# Altium PCB zx-SD-Card_SPI.PcbDoc
Units mm, origin at the board's own origin, x right, y up, seen from the top; angles counter-clockwise.
Board outline 94.78 x 52 mm, 2 copper layers (Top Layer, Bottom Layer); 27 components, 62 nets, 250 pads, 75 vias.
Unrouted connection lines stored in the file: 1.
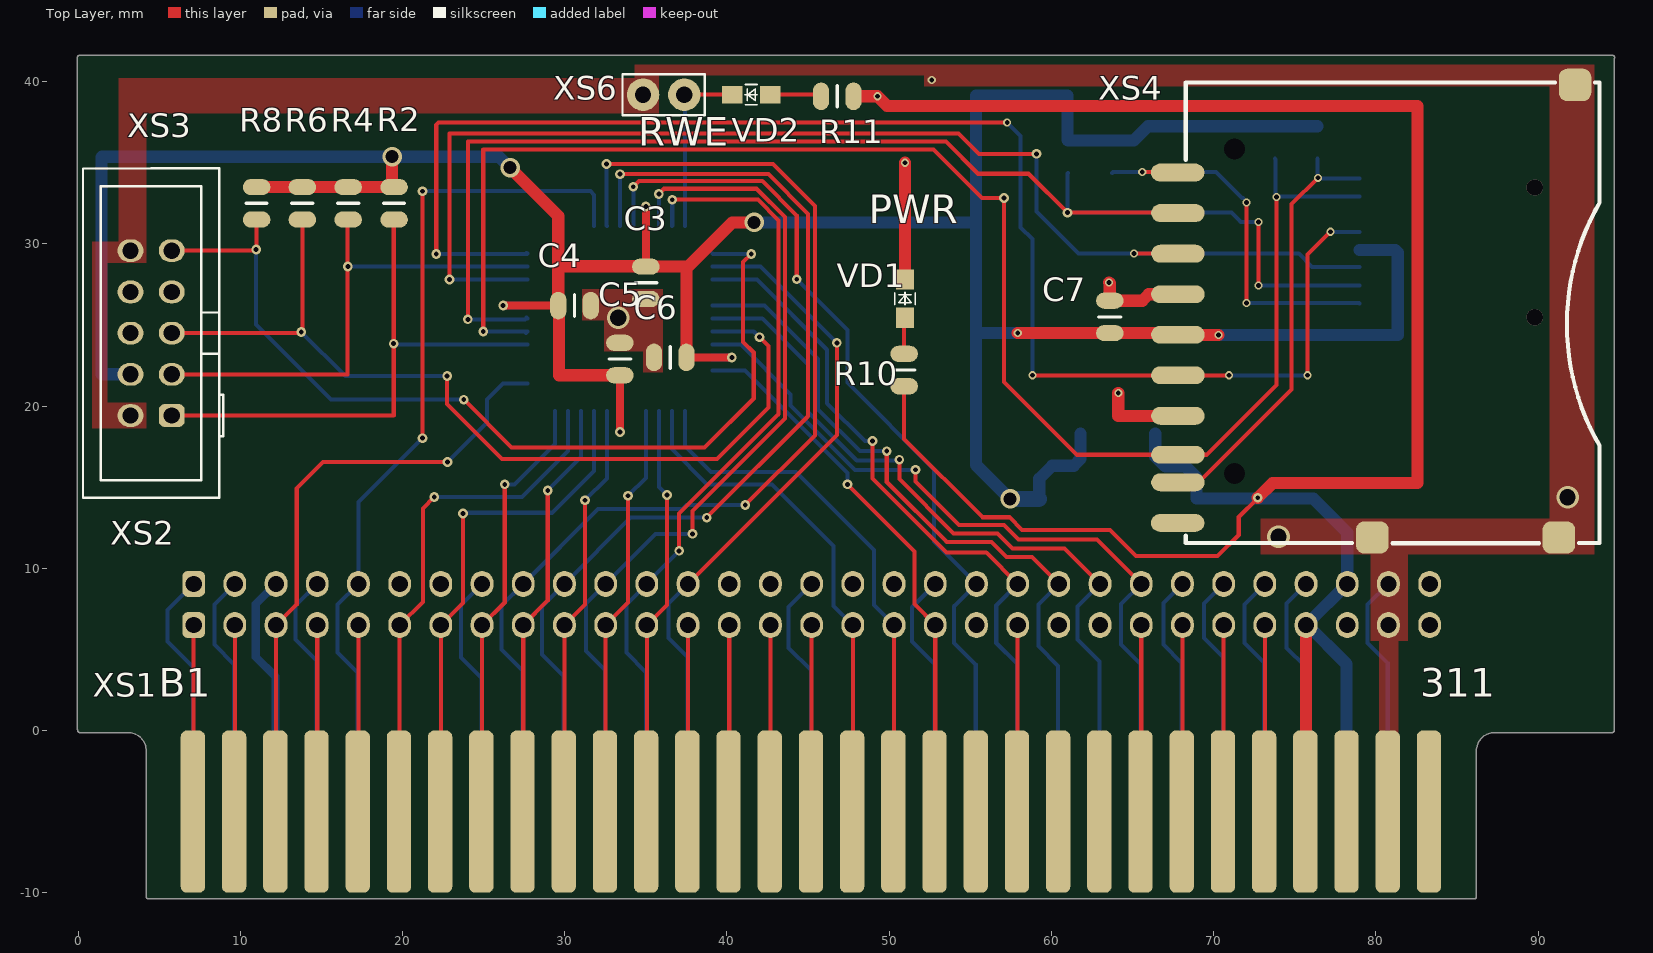
[diagram p0: Top Layer view]
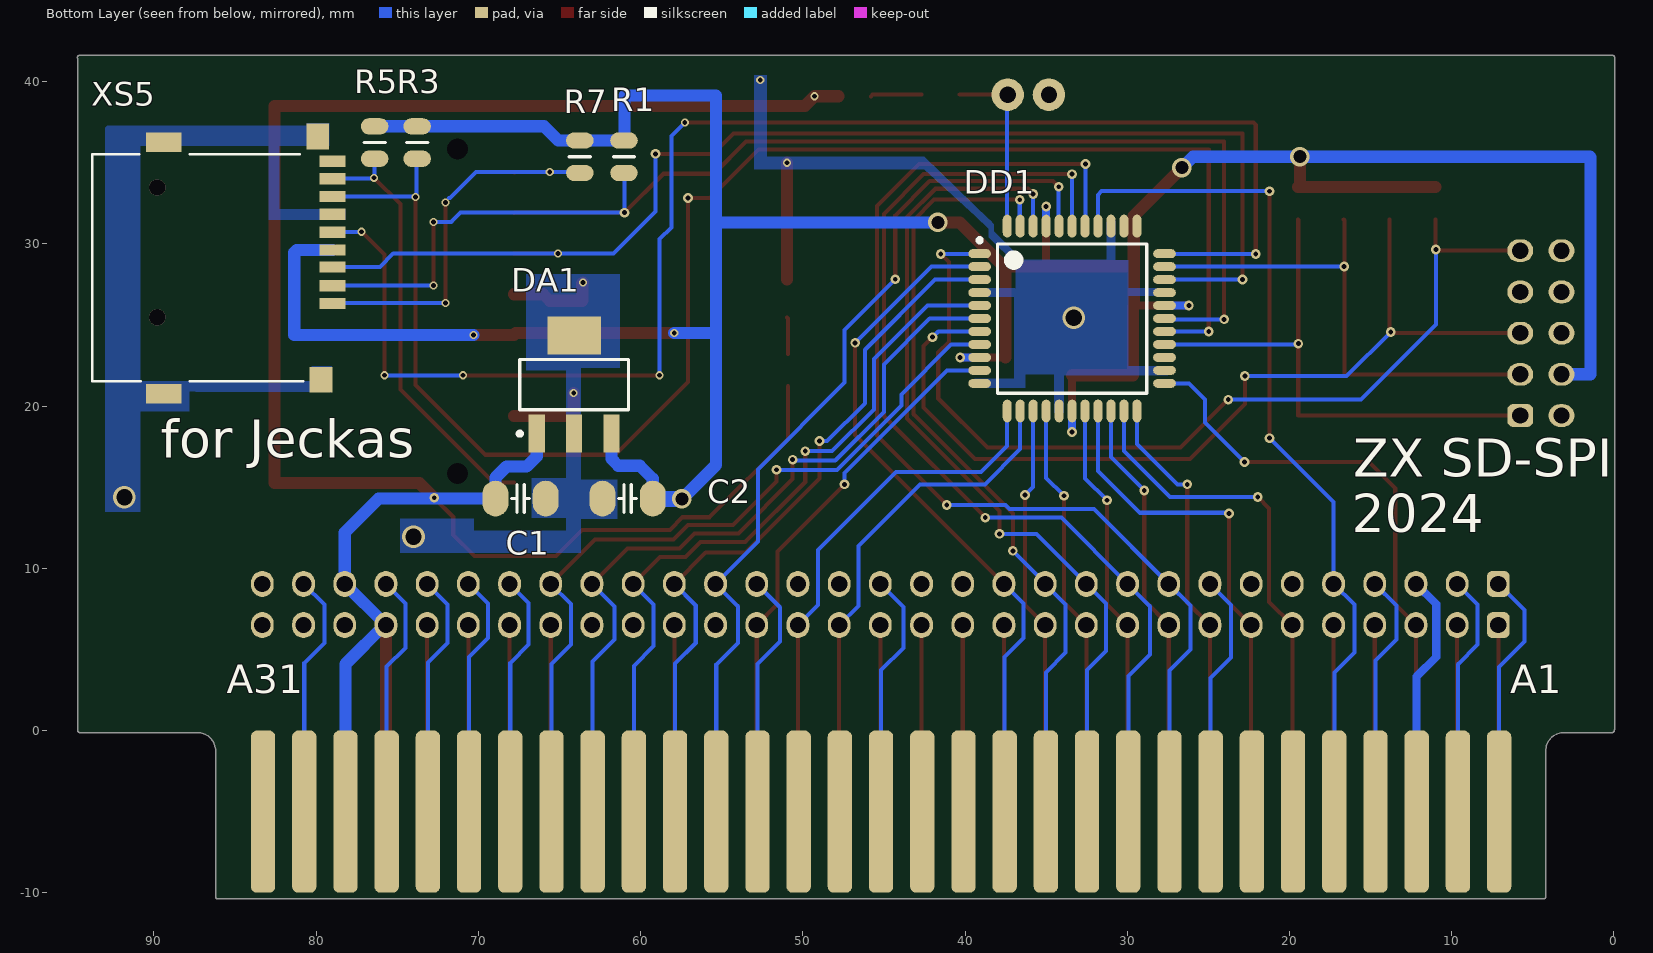
[diagram p1: Bottom Layer view, seen from below]
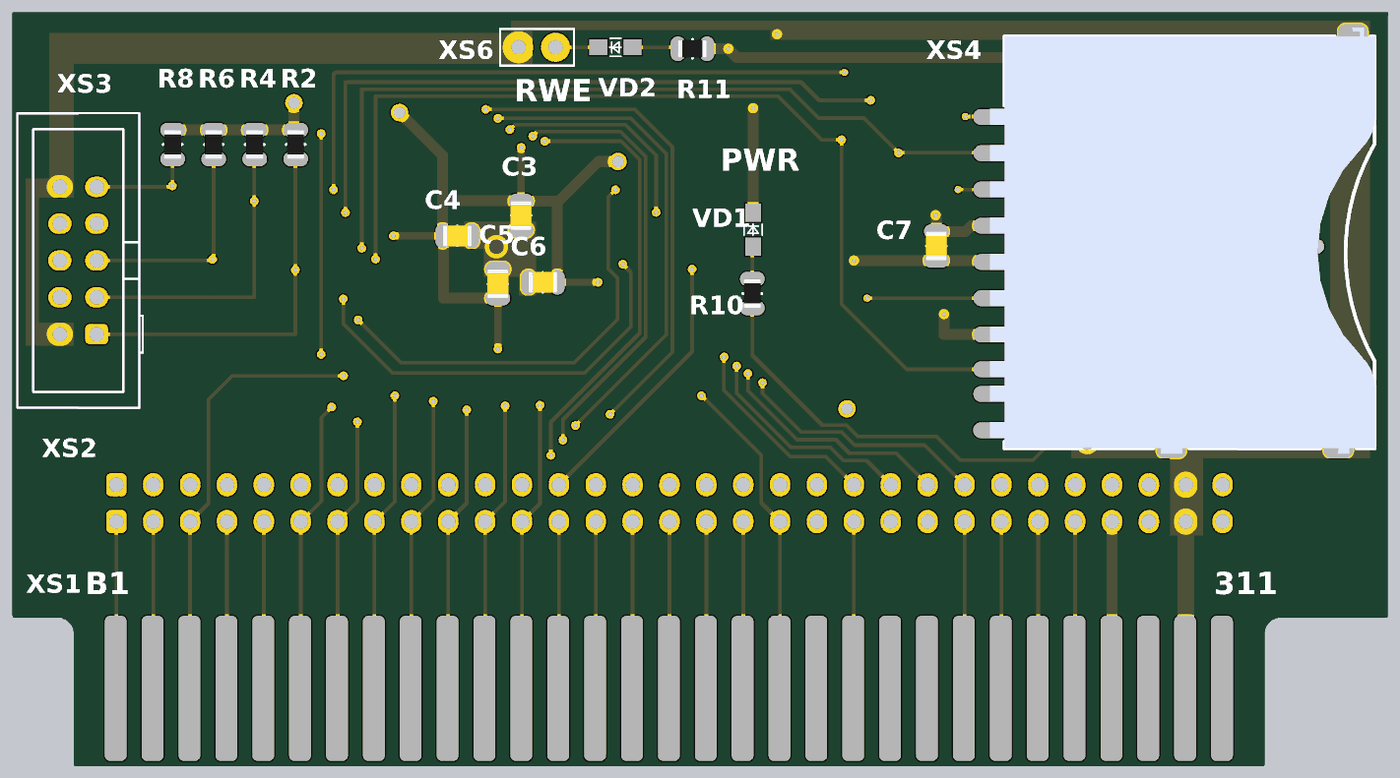
[diagram p2: 3D render of the assembled board from above, using the file's embedded part models]
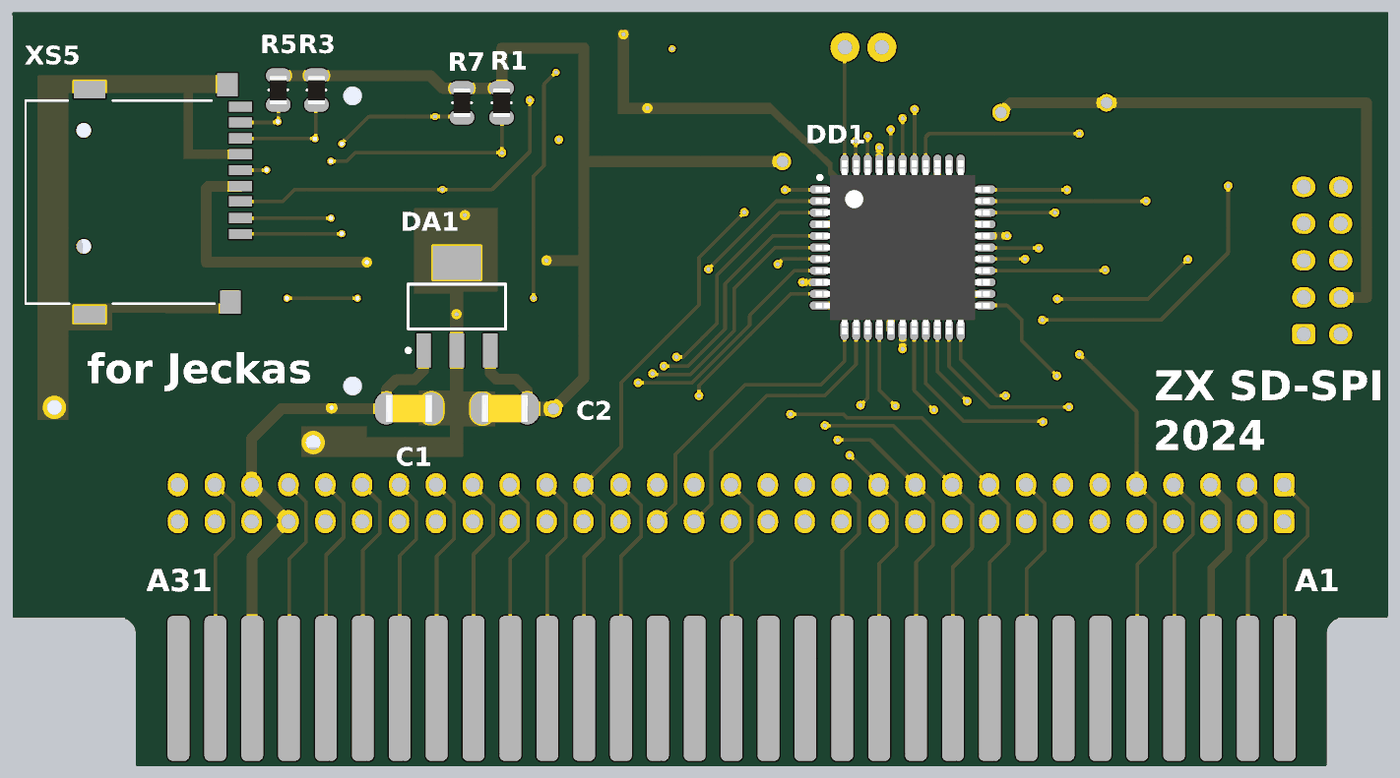
[diagram p3: 3D render of the assembled board from below, using the file's embedded part models]

## Layer stack, top to bottom
Top Solder: solder mask 0.0102, Solder Resist, Dk 3.5
Top Layer: signal copper 0.0356
Dielectric 1: dielectric 0.32, FR-4, Dk 4.8
Bottom Layer: signal copper 0.0356
Bottom Solder: solder mask 0.0102, Solder Resist, Dk 3.5

## Board outline
4.198,-10.25 4.198,-1.25 cw(c4.325,-1.25) 4.198,-1.249 cw(c3.075,-1.25) 4.198,-1.25 ccw(c4.325,-1.25) 4.198,-1.25 4.198,-1.249 ccw(c3.075,-1.25) 3.075,-0.127 0.1,-0.127 cw(c0.1,0) -0.026,0.022 cw(c0.075,0.1) -0.052,0.1 -0.052,41.5 cw(c0.075,41.5) 0.075,41.627 94.6,41.627 cw(c94.6,41.5) 94.727,41.5 cw(c94.6,41.5) 94.702,41.424 94.702,0 cw(c94.575,0) 94.537,-0.122 cw(c94.5,0) 94.5,-0.127 87.325,-0.127 ccw(c87.325,-1.25) 86.202,-1.249 cw(c86.075,-1.25) 86.202,-1.25 86.202,-10.25 cw(c86.075,-10.25) 86.075,-10.377 4.325,-10.377 cw(c4.325,-10.25)

## Design rules (kind name [scope] priority, off if disabled: settings)
Clearance [All] p1: gap=0.15 ignorepadtopadclearanceinfootprint=FALSE
PolygonConnect [All] p1: connectstyle=Direct reliefconductorwidth=0.254 reliefentries=4 polygonreliefangle="90 Angle" airgapwidth=0.254
RoutingVias [All] p1: holewidth=0.3 width=0.6 viastyle="Through Hole" minholewidth=0.2 minwidth=0.4 maxholewidth=2 maxwidth=3
SolderMaskExpansion [All] p1: expansion=0.102
Width [All] p1: maxlimit=2 minlimit=0.2 preferedwidth=0.75
30 further rules are at their usual default settings.

## Components (designator, comment, footprint, x,y, rotation, side; value= is the part's Value field where it differs from the comment)
C1 "1 мкФ" "CAP C 3216 (1206) 1.9h" 67.4,14.3 r0 bottom
C2 "1 мкФ" "CAP C 3216 (1206) 1.9h" 60.8,14.3 r180 bottom
C3 "1 мкФ" "CAP C 2012 (0805) 1.45h" 35,27.6 r270 top
C4 "1 мкФ" "CAP C 2012 (0805) 1.45h" 30.6,26.2 r0 top
C5 "1 мкФ" "CAP C 2012 (0805) 1.45h" 33.4,22.9 r90 top
C6 "1 мкФ" "CAP C 2012 (0805) 1.45h" 36.5,23 r180 top
C7 "1 мкФ" "CAP C 2012 (0805) 1.45h" 63.6,25.5 r90 top
DA1 "MIC39100-3.3WS" MIC39100-3.3WS 64.1,21.325 r90 bottom
DD1 "EPM3032" "ALTERA TQFP-44" 33.4,25.4 r180 bottom
R1 "10 кОм" "RES C 2012 (0805) 0.65h" 61.025,35.375 r90 bottom
R2 "10 кОм" "RES C 2012 (0805) 0.65h" 19.475,32.5 r270 top
R3 "10 кОм" "RES C 2012 (0805) 0.65h" 73.775,36.25 r90 bottom
R4 "10 кОм" "RES C 2012 (0805) 0.65h" 16.65,32.5 r270 top
R5 "10 кОм" "RES C 2012 (0805) 0.65h" 76.4,36.25 r90 bottom
R6 "10 кОм" "RES C 2012 (0805) 0.65h" 13.825,32.5 r270 top
R7 "10 кОм" "RES C 2012 (0805) 0.65h" 63.75,35.375 r90 bottom
R8 "10 кОм" "RES C 2012 (0805) 0.65h" 11,32.5 r270 top
R10 "510 Ом" "RES C 2012 (0805) 0.65h" 50.925,22.225 r90 top
R11 "510 Ом" "RES C 2012 (0805) 0.65h" 46.8,39.1 r180 top
VD1 "KPT-2012" KPT-2012 50.975,26.625 r90 top
VD2 "KPT-2012" KPT-2012 41.5,39.2 r180 top
XS1 "KLS1-603C-62S" "KLS1-603 ISA" 45.175,-5 r0 top
XS2 "KLS1-603C-62S" KLS1-603C-64S 45.22,7.77 r0 top
XS3 "BH-10" BH-10 4.5,24.5 r90 top
XS4 "104D-TCA0-R03" 104D-TCA0-R03 67.786,34.4 r0 top
XS5 "uSD header" uSD 84.3,28.7 r270 bottom
XS6 "PLS-2" PLS-2 36.1,39.2 r180 top

## Footprints (in the part's own frame and the unit in brackets; to place one, negate y for a bottom-side part, rotate by r counter-clockwise, add the part's x,y. Pads: shape width x height; smd on the part's side, far side on the other; paste and mask are expansions set on the pad)
104D-TCA0-R03 [mm]
  oval 3.3x1.1 smd mask+0.1: 1(0.014,-2.5) 2(0.014,-5) 3(0.014,-7.5) 4(0.014,-10) 5(0.014,-12.5) 6(0.014,-15) 7(0.014,-17.4) 8(0.014,-19.1) 9(0,0) 10(0,-21.6)
  rrect50% 2x2 smd: 11(12,-22.5) 13(24.5,5.4)
  rrect50% 2x2 smd mask+0.1: 12(23.5,-22.5)
  round 0 hole 1.3 unplated: 14(3.5,1.45) 15(3.5,-18.55)
  silkscreen extent 0.5,-22.85 26.01,5.55, body extent -0.48,-23.24 26.02,6.16, height 2.75
"ALTERA TQFP-44" [mm]
  oval 1.4x0.55 smd: 1(-5.7,4) 2(-5.7,3.2) 3(-5.7,2.4) 4(-5.7,1.6) 5(-5.7,0.8) 6(-5.7,0) 7(-5.7,-0.8) 8(-5.7,-1.6) 9(-5.7,-2.4) 10(-5.7,-3.2) 11(-5.7,-4) 23(5.7,-4) 24(5.7,-3.2) 25(5.7,-2.4) 26(5.7,-1.6) 27(5.7,-0.8) 28(5.7,0) 29(5.7,0.8) 30(5.7,1.6) 31(5.7,2.4) 32(5.7,3.2) 33(5.7,4)
  oval 0.55x1.4 smd: 12(-4,-5.7) 13(-3.2,-5.7) 14(-2.4,-5.7) 15(-1.6,-5.7) 16(-0.8,-5.7) 17(0,-5.7) 18(0.8,-5.7) 19(1.6,-5.7) 20(2.4,-5.7) 21(3.2,-5.7) 22(4,-5.7) 34(4,5.7) 35(3.2,5.7) 36(2.4,5.7) 37(1.6,5.7) 38(0.8,5.7) 39(0,5.7) 40(-0.8,5.7) 41(-1.6,5.7) 42(-2.4,5.7) 43(-3.2,5.7) 44(-4,5.7)
  silkscreen extent -5.82,-4.6 4.6,4.95, body extent -6,-6 6,6, height 0.2
BH-10 [mm] "IDC разъем 2,54 мм, на плату"
  rrect50% 1.4x1.6 hole 1: 1(-5.08,-1.27)
  oval 1.4x1.6 hole 1: 2(-5.08,1.27) 3(-2.54,-1.27) 4(-2.54,1.27) 5(0,-1.27) 6(0,1.27) 7(2.54,-1.27) 8(2.54,1.27) 9(5.08,-1.27) 10(5.08,1.27)
  silkscreen extent -10.16,-4.45 10.16,4.2
"CAP C 2012 (0805) 1.45h" [mm] "Chip Capacitor, non-polarized, 2.0x1.3mm"
  oval 1x1.7 smd: 1(-1,0) 2(1,0)
  silkscreen extent 0,-0.67 0,0.67, body extent -1,-0.73 1,0.72, height 1.19
"CAP C 3216 (1206) 1.9h" [mm] "Chip Capacitor, non-polarized, 3.2x1.6mm"
  oval 1.6x2.2 smd: 1(-1.55,0) 2(1.55,0)
  silkscreen extent -0.55,-0.85 0.55,0.85, body extent -1.6,-0.95 1.6,0.95, height 1.59
"KLS1-603 ISA" [mm]
  rrect50% 1.5x10 smd far side: A1(-38.1,0) A2(-35.56,0) A3(-33.02,0) A4(-30.48,0) A5(-27.94,0) A6(-25.4,0) A7(-22.86,0) A8(-20.32,0) A9(-17.78,0) A10(-15.24,0) A11(-12.7,0) A12(-10.16,0) A13(-7.62,0) A14(-5.08,0) A15(-2.54,0) A16(0,0) A17(2.54,0) A18(5.08,0) A19(7.62,0) A20(10.16,0) A21(12.7,0) A22(15.24,0) A23(17.78,0) A24(20.32,0) A25(22.86,0) A26(25.4,0) A27(27.94,0) A28(30.48,0) A29(33.02,0) A30(35.56,0) A31(38.1,0)
  rrect50% 1.5x10 smd: B1(-38.1,0) B2(-35.56,0) B3(-33.02,0) B4(-30.48,0) B5(-27.94,0) B6(-25.4,0) B7(-22.86,0) B8(-20.32,0) B9(-17.78,0) B10(-15.24,0) B11(-12.7,0) B12(-10.16,0) B13(-7.62,0) B14(-5.08,0) B15(-2.54,0) B16(0,0) B17(2.54,0) B18(5.08,0) B19(7.62,0) B20(10.16,0) B21(12.7,0) B22(15.24,0) B23(17.78,0) B24(20.32,0) B25(22.86,0) B26(25.4,0) B27(27.94,0) B28(30.48,0) B29(33.02,0) B30(35.56,0) B31(38.1,0)
KLS1-603C-64S [mm]
  rrect50% 1.4x1.6 hole 1: A1(-38.1,1.27) B1(-38.1,-1.27)
  oval 1.4x1.6 hole 1: A2(-35.56,1.27) A3(-33.02,1.27) A4(-30.48,1.27) A5(-27.94,1.27) A6(-25.4,1.27) A7(-22.86,1.27) A8(-20.32,1.27) A9(-17.78,1.27) A10(-15.24,1.27) A11(-12.7,1.27) A12(-10.16,1.27) A13(-7.62,1.27) A14(-5.08,1.27) A15(-2.54,1.27) A16(0,1.27) A17(2.54,1.27) A18(5.08,1.27) A19(7.62,1.27) A20(10.16,1.27) A21(12.7,1.27) A22(15.24,1.27) A23(17.78,1.27) A24(20.32,1.27) A25(22.86,1.27) A26(25.4,1.27) A27(27.94,1.27) A28(30.48,1.27) A29(33.02,1.27) A30(35.56,1.27) A31(38.1,1.27) B2(-35.56,-1.27) B3(-33.02,-1.27) B4(-30.48,-1.27) B5(-27.94,-1.27) B6(-25.4,-1.27) B7(-22.86,-1.27) B8(-20.32,-1.27) B9(-17.78,-1.27) B10(-15.24,-1.27) B11(-12.7,-1.27) B12(-10.16,-1.27) B13(-7.62,-1.27) B14(-5.08,-1.27) B15(-2.54,-1.27) B16(0,-1.27) B17(2.54,-1.27) B18(5.08,-1.27) B19(7.62,-1.27) B20(10.16,-1.27) B21(12.7,-1.27) B22(15.24,-1.27) B23(17.78,-1.27) B24(20.32,-1.27) B25(22.86,-1.27) B26(25.4,-1.27) B27(27.94,-1.27) B28(30.48,-1.27) B29(33.02,-1.27) B30(35.56,-1.27) B31(38.1,-1.27)
KPT-2012 [mm] "SMD LED"
  rect 1.25x1.1 smd: 1(-1.175,0) 2(1.175,0)
  silkscreen extent -0.38,-0.63 0.4,0.63
MIC39100-3.3WS [mm] "SOT223, 4-Leads, Body 6,50x7,00mm (avg), Pitch 2,30mm, IPC Low Density"
  rect 2.35x1 smd: 1(-3.025,2.3) 2(-3.025,0) 3(-3.025,-2.3)
  rect 2.35x3.3 smd: 4(3.025,0)
  silkscreen extent -3.15,-3.35 1.55,3.48, body extent -1.85,-3.35 1.85,3.35, height 1.8
PLS-2 [mm]
  round 2 hole 1: 1(-1.27,0) 2(1.27,0)
  silkscreen extent -2.54,-1.27 2.54,1.27
"RES C 2012 (0805) 0.65h" [mm] "Chip Resistor, Body 2.0x1.3mm, 0.125 Watt"
  oval 1x1.7 smd: 1(-1,0) 2(1,0)
  silkscreen extent 0,-0.65 0,0.65, body extent -1,-0.6 1,0.6, height 0.6
uSD [mm]
  rect 1.6x1.4 smd: 0(-7.925,4.4) 0(7.075,4.6)
  rect 1.2x2.2 smd: 0(-7.575,-5.1) 0(7.925,-5.1)
  rect 0.7x1.6 smd: 1(2.375,5.3) 2(1.275,5.3) 3(0.125,5.3) 4(-0.925,5.3) 5(-2.025,5.3) 6(-3.125,5.3) 7(-4.225,5.3) 8(-5.325,5.3) 9(-6.4,5.3)
  silkscreen extent -6.83,-9.5 7.18,3.5

## Part data
C1 C2: library part "ЧИП-1206-X5R-1 мкФ 50В ±10%", "Конденсатор не полярный", AltValue=1, Dielectric=X5R, Manufacturer=Yageo, Part Number=CC1206KKX5R9BB105, Standard sizes of packages="3216 (1206)", Tolerance=±10%, Voltage=50, FullName="ЧИП-1206-X5R-1 мкФ 50В ±10%", Name=ЧИП-1206, Nominal=1000000, Note="Конденсатор типоразмер 3216 (1206), general purpose", Units=мкФ
C3 C4 C5 C6 C7: library part "ЧИП-0805-X5R-1 мкФ 50В ±10%", "Конденсатор не полярный", AltValue=1, Dielectric=X5R, Manufacturer=Yageo, Part Number=CC0805KKX5R9BB105, Standard sizes of packages="2012 (0805)", Tolerance=±10%, Voltage=50, FullName="ЧИП-0805-X5R-1 мкФ 50В ±10%", Name=ЧИП-0805, Nominal=1000000, Note="Конденсатор типоразмер 2012 (0805), general purpose", Units=мкФ
DA1: "LDO 3.3V 1A"
R1 R2 R3 R4 R5 R6 R7 R8: library part "ЧИП-0805-10 кОм ±1%", "Резистор 0.125 Вт", AltValue=10, Manufacturer=Yageo, Part Number=RC0805FR-0710KL, Power="1/8W (0.125W)", Standard sizes of packages="2012 (0805)", Tolerance=±1%, FullName="ЧИП-0805-10 кОм ±1%", Name=ЧИП-0805, Nominal=10000, Note="Резистор постоянный, 0805", Units=кОм
R10 R11: library part "ЧИП-0805-510 Ом ±5%", "Резистор 0.125 Вт", AltValue=510, Manufacturer=Yageo, Part Number=RC0805JR-07510RL, Power="1/8W (0.125W)", Standard sizes of packages="2012 (0805)", Tolerance=±5%, FullName="ЧИП-0805-510 Ом ±5%", Name=ЧИП-0805, Nominal=510, Note="Резистор постоянный, 0805", Units=Ом
XS1 XS2: library part KLS1-603C-64S
XS3: library part AVR_ISP_JTAG
XS4: Manufacturer="Attend technology", FullName=104D-TCA0-R03, Help URL=www.attend.com.tw, Note="Разъем для SD карты", Part Number=104D-TCA0-R03
XS5: library part uSD, "uSD"

## Via types
v1: diameter 0.6, hole 0.3, Top Layer to Bottom Layer, 46 vias
v2: diameter 0.5, hole 0.3, Top Layer to Bottom Layer, 20 vias
v3: diameter 1.2, hole 0.8, Top Layer to Bottom Layer, 4 vias
v4: diameter 1.4, hole 1, Top Layer to Bottom Layer, 3 vias
v5: diameter 1, hole 1, Top Layer to Bottom Layer, 2 vias

## Nets (pads, with @x,y where several pads share a name; then routed paths per layer and width w, separated by ;. In a path a pad name is that pad's centre, name@x,y a point inside that pad or via, vN(x,y) a via of type N, cw(c..) or ccw(c..) an arc to the next point about the centre after c; other vN are vias at no path point)
"14 MHz": DD1.37 XS1.A5 XS2.A5 | length 53.5
  Top Layer w0.25: v1(21.225,18.025) v1(21.225,33.25)
  Bottom Layer w0.25: XS1.A5 17.235,3.565 16,4.8 16,7.76 XS2.A5 17.28,14.08 v1(21.225,18.025) ; v1(21.225,33.25) 31.575,33.25 31.8,33.025 DD1.37
+3.3V: C2.2 C3.1 C4.1 C5.1 C6.1 C7.1 DA1.3 DD1.9 DD1.17 DD1.29 DD1.41 R1.2 R2.1 R3.2 R4.1 R5.2 R6.1 R7.2 R8.1 XS3.4 XS4.4 XS5.4 | length 211.1
  Top Layer w0.5: v1(26.2,26.2) C4.1 ; v1(33.4,18.4) C5.1 ; C3.1 v1(35,32.3) ; C6.1 v1(40.3,23)
  Top Layer w0.75: R8.1 R6.1 R4.1 R2.1 19.35,33.625 v3(19.35,35.375) ; v3(26.625,34.7) 29.6,31.725 29.6,28.625 ; C5.1 29.65,21.9 29.65,26.15 C4.1 29.6,28.625 ; C6.1 37.5,28.5 ; v3(41.675,31.325) 40.325,31.325 37.5,28.5 ; v2(57.925,24.5) C7.1 67.7,24.5 XS4.4 67.825,24.375 v2(70.3,24.375) ; 29.6,28.625 34.975,28.625 C3.1 37.4,28.6 37.5,28.5
  Bottom Layer w0.5: v1(26.2,26.2) DD1.29 ; v1(33.4,18.4) DD1.17 ; DD1.41 v1(35,32.3) ; DD1.9 v1(40.3,23)
  Bottom Layer w0.75: XS3.4 1.44,21.96 1.44,35.34 1.475,35.375 v3(19.35,35.375) 25.95,35.375 v3(26.625,34.7) ; v3(41.675,31.325) 55.35,31.325 ; v3(57.45,14.275) 55.35,16.375 55.35,24.525 ; v2(57.925,24.5) 55.375,24.5 55.35,24.525 ; C2.2@59.225,14.275 C2.2 59.25,15.525 60.05,16.325 61.375,16.325 61.8,16.75 DA1.3 ; v2(70.3,24.375) 81.35,24.375 81.35,29.475 81.2,29.625 XS5.4 ; R5.2 R3.2 65.95,37.25 65.075,36.375 R7.2 R1.2 61,36.4 61,39.15 55.35,39.15 55.35,31.325 ; 55.35,24.525 55.35,31.325
  Bottom Layer w1: v3(57.45,14.275) C2.2@59.225,14.275
+5V: C1.2 DA1.1 R10.1 R11.1 XS1.A3 XS1.A29 XS1.B28 XS2.A3 XS2.A29 XS2.B28 | length 160.5
  Top Layer w0.25: R10.1 50.925,17.975 55.75,13.15 57.425,13.15 58.2,12.375 63.6,12.375 65.225,10.75 70.25,10.75 71.55,12.05 71.55,13.175 v1(72.725,14.35) ; XS1.B28 XS1.B28@75.7,-4.955
  Top Layer w0.75: R11.1 v2(49.275,39.1) 49.875,38.5 82.575,38.5 82.575,15.25 73.625,15.25 v1(72.725,14.35) ; XS1.B28@75.7,-4.955 XS2.B28
  Bottom Layer w0.5: XS1.A3 12.155,3.32 10.95,4.525 10.95,7.79 XS2.A3
  Bottom Layer w0.75: DA1.1 66.4,16.9 67.025,16.275 68.275,16.275 68.95,15.6 C1.2 76.15,14.3 78.24,12.21 XS2.A29 75.75,6.55 78.195,4.105 XS1.A29
A0: DD1.38 XS1.A9 XS2.A9 | length 68.8
  Top Layer w0.25: v1(32.575,34.925) 42.825,34.925 45.425,32.325 45.425,18.2 v1(41.125,13.9)
  Bottom Layer w0.25: XS1.A9 27.395,3.705 26.1,5 26.1,7.7 XS2.A9 32.05,13.65 37.25,13.65 37.5,13.9 v1(41.125,13.9) ; v1(32.575,34.925) 32.575,31.125 DD1.38
A1: DD1.39 XS1.A10 XS2.A10 | length 62.8
  Top Layer w0.25: v1(33.4,34.3) 42.55,34.3 45,31.85 45,19.375 v1(38.75,13.125)
  Bottom Layer w0.25: XS1.A10 29.935,3.365 28.6,4.7 28.6,7.66 XS2.A10 34.065,13.125 v1(38.75,13.125) ; DD1.39 v1(33.4,34.3)
A2: DD1.42 XS1.A11 XS2.A11 | length 54.2
  Top Layer w0.25: v1(35.8,33.075) 36.125,33.4 41.825,33.4 43.575,31.65 43.575,19.225 37.875,13.525 v1(37.875,12.125)
  Bottom Layer w0.25: XS1.A11 32.475,3.725 31.3,4.9 31.3,7.82 XS2.A11 35.605,12.125 v1(37.875,12.125) ; DD1.42 v1(35.8,33.075)
A3: DD1.43 XS1.A12 XS2.A12 | length 49.6
  Top Layer w0.25: v1(36.625,32.725) 41.9,32.725 43.175,31.45 43.175,19.5 37.05,13.375 v1(37.05,11.075)
  Bottom Layer w0.25: XS1.A12 35.015,3.585 33.8,4.8 33.8,7.78 XS2.A12 35.06,9.085 v1(37.05,11.075) ; DD1.43 36.625,31.125 v1(36.625,32.725)
A4: DD1.8 XS1.A24 XS2.A24 | length 48.4
  Top Layer w0.25: v1(51.625,16.075) 51.625,15.35 54.3,12.675 57.075,12.675 57.975,11.775 62.805,11.775 XS2.A24
  Bottom Layer w0.25: DD1.8 40.85,23.8 43.925,20.725 43.925,20.05 47.9,16.075 v1(51.625,16.075) ; XS1.A24 65.495,4.105 64.3,5.3 64.3,7.8 XS2.A24
A5: DD1.6 XS1.A23 XS2.A23 | length 48.3
  Top Layer w0.25: v1(50.625,16.7) 50.625,15.5 53.975,12.15 56.675,12.15 57.6,11.225 60.815,11.225 XS2.A23
  Bottom Layer w0.25: DD1.6 42.175,25.4 45,22.575 45,19.65 48,16.65 50.575,16.65 v1(50.625,16.7) ; XS1.A23 62.955,4.245 61.6,5.6 61.6,7.64 XS2.A23
A6: DD1.5 XS1.A22 XS2.A22 | length 46.5
  Top Layer w0.25: v1(49.85,17.225) 49.85,15.325 53.55,11.625 56.3,11.625 57.225,10.7 58.8,10.7 XS2.A22
  Bottom Layer w0.25: DD1.5 42.325,26.2 45.625,22.9 45.625,19.8 48.2,17.225 v1(49.85,17.225) ; XS1.A22 60.415,3.985 59.2,5.2 59.2,7.78 XS2.A22
A7: DD1.3 XS1.A21 XS2.A21 | length 45
  Top Layer w0.25: v1(48.975,17.85) 48.975,15.525 53.525,10.975 55.985,10.975 XS2.A21
  Bottom Layer w0.25: DD1.3 41.85,27.8 46.175,23.475 46.175,20.175 48.5,17.85 v1(48.975,17.85) ; XS1.A21 57.875,4.125 56.6,5.4 56.6,7.72 XS2.A21
A8: XS1.B26 XS2.B26 | length 11.5
  Top Layer w0.25: XS1.B26 70.62,-4.955 XS2.B26
A9: XS1.A27 XS2.A27 | length 15.1
  Bottom Layer w0.25: XS1.A27 73.115,4.185 71.9,5.4 71.9,7.78 XS2.A27
A10: XS1.B27 XS2.B27 | length 11.5
  Top Layer w0.25: XS1.B27 73.16,-4.955 XS2.B27
A11: XS1.A28 XS2.A28 | length 15
  Bottom Layer w0.25: XS1.A28 75.655,3.945 74.5,5.1 74.5,7.84 XS2.A28
A12: XS1.A2 XS2.A2 | length 15.1
  Bottom Layer w0.25: XS1.A2 9.615,4.085 8.4,5.3 8.4,7.78 XS2.A2
A13: XS1.B2 XS2.B2 | length 11.5
  Top Layer w0.25: XS1.B2 9.66,-4.955 XS2.B2
A14: XS1.A1 XS2.A1 | length 15.4
  Bottom Layer w0.25: XS1.A1 7.075,3.925 5.5,5.5 5.5,7.42 XS2.A1
A15: XS1.B1 XS2.B1 | length 11.5
  Top Layer w0.25: XS1.B1 7.12,-4.955 XS2.B1
B\U\S\A\K\: XS1.A26 XS2.A26 | length 15
  Bottom Layer w0.25: XS1.A26 70.575,4.525 69.4,5.7 69.4,7.82 XS2.A26
B\U\S\R\Q\: XS1.A19 XS2.A19 | length 15.2
  Bottom Layer w0.25: XS1.A19 52.795,4.105 51.4,5.5 51.4,7.6 XS2.A19
C\S\D\S\: XS1.B4 XS2.B4 | length 11.5
  Top Layer w0.25: XS1.B4 14.74,-4.955 XS2.B4
C\S\R\O\M\: XS1.A25 XS2.A25 | length 15
  Bottom Layer w0.25: XS1.A25 68.035,4.165 66.9,5.3 66.9,7.86 XS2.A25
D0: DD1.21 XS1.B6 XS2.B6 | length 32.2
  Top Layer w0.25: XS1.B6 19.82,-4.955 XS2.B6 21.25,7.93 21.25,13.7 v1(21.95,14.4)
  Bottom Layer w0.25: v1(21.95,14.4) 27.375,14.4 30.2,17.225 DD1.21
D1: DD1.19 XS1.B7 XS2.B7 | length 31.8
  Top Layer w0.25: XS1.B7 22.36,-4.955 XS2.B7 23.725,7.865 v1(23.725,13.375)
  Bottom Layer w0.25: v1@23.7,13.425 29.225,13.425 31.8,16 DD1.19
D2: DD1.22 XS1.B8 XS2.B8 | length 26.9
  Top Layer w0.25: XS1.B8 24.9,-4.955 XS2.B8 26.3,7.9 v1(26.3,15.175)
  Bottom Layer w0.25: v1(26.3,15.175) 26.9,15.175 29.4,17.675 DD1.22
D3: DD1.15 XS1.B11 XS2.B11 | length 25.7
  Top Layer w0.25: XS1.B11 32.52,-4.955 XS2.B11 33.9,7.88 v1(33.9,14.475)
  Bottom Layer w0.25: v1(33.9,14.475) 35,15.575 DD1.15
D4: DD1.14 XS1.B12 XS2.B12 | length 25.4
  Top Layer w0.25: XS1.B12 35.06,-4.955 XS2.B12 36.3,7.74 v1(36.3,14.525)
  Bottom Layer w0.25: DD1.14 35.8,15.025 v1(36.3,14.525)
D5: DD1.18 XS1.B10 XS2.B10 | length 25.8
  Top Layer w0.25: XS1.B10 29.98,-4.955 XS2.B10 31.25,7.77 v1(31.25,14.2)
  Bottom Layer w0.25: v1(31.25,14.2) 32.6,15.55 DD1.18
D6: DD1.20 XS1.B9 XS2.B9 | length 26.2
  Top Layer w0.25: XS1.B9 27.44,-4.955 XS2.B9 28.95,8.01 v1(28.95,14.8)
  Bottom Layer w0.25: v1(28.95,14.8) 31,16.85 DD1.20
D7: DD1.23 XS1.B3 XS2.B3 | length 38.2
  Top Layer w0.25: XS1.B3 12.2,-4.955 XS2.B3 13.475,7.775 13.475,14.925 15.1,16.55 v1(22.775,16.55)
  Bottom Layer w0.25: v1@22.762,16.563 25.2,19 25.2,20.4 26.2,21.4 DD1.23
D\O\S\: XS1.A4 XS2.A4 | length 15.1
  Bottom Layer w0.25: XS1.A4 14.695,4.305 13.4,5.6 13.4,7.7 XS2.A4
gnd: C1.1 C2.1 C3.2 C4.2 C5.2 C6.2 C7.2 DA1.2 DA1.4 DD1.4 DD1.11 DD1.16 DD1.24 DD1.30 DD1.36 VD1.2 XS1.A30 XS1.B30 XS2.A30 XS2.B30 XS3.2 XS3.10 XS4.3 XS4.6 XS4.11 XS4.12 XS4.13 XS5.0 XS5.6 XS6.2 | length 33
  Top Layer w0.25: XS1.B30 XS1.B30@80.78,-4.955
  Top Layer w0.75: XS3.10@3.16,29.65 XS3.10 ; VD1.2 v2(50.975,35) ; v2(63.55,27.625) 63.6,27.575 C7.2 65.6,26.5 66,26.9 XS4.3 ; v2(64.125,20.8) 64.125,19.4 XS4.6
  Bottom Layer w0.25: XS1.A30 80.735,4.165 79.5,5.4 79.5,7.76 XS2.A30
  other v2: 52.625,40.1
  other v4: 74,11.95 91.825,14.375 33.3,25.45
H\A\L\T\: XS1.B15 XS2.B15 | length 11.5
  Top Layer w0.25: XS1.B15 42.68,-4.955 XS2.B15
I\N\T\: XS1.B13 XS2.B13 | length 11.5
  Top Layer w0.25: XS1.B13 37.6,-4.955 XS2.B13
I\O\R\Q\: DD1.13 XS1.B17 XS2.B17 | length 31.7
  Top Layer w0.25: XS1.B17 47.76,-4.955 XS2.B17
  Bottom Layer w0.25: DD1.13 36.6,17.35 38.775,15.175 42.775,15.175 46.575,11.375 46.575,7.685 XS2.B17
I\O\R\Q\G\E\: DD1.2 XS1.A13 XS2.A13 | length 43.3
  Top Layer w0.25: XS2.A13 46.775,18.215 v1(46.775,23.9)
  Bottom Layer w0.25: XS1.A13 37.555,4.545 36.4,5.7 36.4,7.84 XS2.A13 ; DD1.2 42.075,28.6 v1(46.775,23.9)
M\1\: XS1.B24 XS2.B24 | length 11.5
  Top Layer w0.25: XS1.B24 65.54,-4.955 XS2.B24
M\R\E\Q\: XS1.B16 XS2.B16 | length 11.5
  Top Layer w0.25: XS1.B16 45.22,-4.955 XS2.B16
MISO: DD1.27 R3.1 XS4.7 XS5.7 | length 98.3
  Top Layer w0.25: v1(24.975,24.6) 24.975,35.825 52.725,35.825 55.725,32.825 v1(57.075,32.825) 57.075,21.5 61.575,17 XS4.7 69.575,17 73.875,21.3 v2(73.875,32.9)
  Bottom Layer w0.25: v1(24.975,24.6) DD1.27 DD1.27@27.6,24.5 ; R3.1 73.825,35.2 73.825,32.925 XS5.7
MOSI: DD1.31 XS4.2 XS5.3 | length 78.1
  Top Layer w0.25: v1(22.9,27.8) 22.9,36.8 54.275,36.8 55.525,35.55 v1(59.075,35.55) ; v2(65.1,29.4) XS4.2
  Bottom Layer w0.25: v1(22.9,27.8) DD1.31 ; v1(59.075,35.55) 59.075,32 61.675,29.4 v2(65.1,29.4) 75.25,29.4 76.075,28.575 XS5.3
N\M\I\: XS1.B14 XS2.B14 | length 11.5
  Top Layer w0.25: XS1.B14 40.14,-4.955 XS2.B14
NetR10_2: R10.2 VD1.1 | length 2.2
  Top Layer w0.25: R10.2 50.925,25.4 VD1.1
NetR11_2: R11.2 VD2.1 | length 3.2
  Top Layer w0.25: VD2.1 45.7,39.2 R11.2
R\D\: DD1.12 XS1.B18 XS2.B18 | length 33.1
  Top Layer w0.25: XS1.B18 50.3,-4.955 XS2.B18
  Bottom Layer w0.25: DD1.12 37.4,17.55 39.025,15.925 44.25,15.925 49.05,11.125 49.05,7.75 XS2.B18
R\E\S\: DD1.40 XS1.A20 XS2.A20 | length 56
  Top Layer w0.25: v1(34.225,33.525) 34.575,33.875 42.175,33.875 44.3,31.75 v1(44.3,27.825)
  Bottom Layer w0.25: DD1.40 34.225,31.125 v1(34.225,33.525) ; v1(44.3,27.825) 47.425,24.7 47.425,21.45 52.775,16.1 52.775,11.645 XS2.A20 54,7.66 54,5.4 55.335,4.065 XS1.A20
R\F\S\H\: XS1.B25 XS2.B25 | length 11.5
  Top Layer w0.25: XS1.B25 68.08,-4.955 XS2.B25
R\W\E\: DD1.44 VD2.2 XS6.1 | length 11.1
  Top Layer w0.25: XS6.1 VD2.2
  Bottom Layer w0.25: XS6.1 37.4,39.17 DD1.44
RAS: XS1.A8 XS2.A8 | length 15.1
  Bottom Layer w0.25: XS1.A8 24.855,3.245 23.6,4.5 23.6,7.74 XS2.A8
RS: XS1.A16 XS2.A16 | length 15.2
  Bottom Layer w0.25: XS1.A16 45.175,3.725 43.8,5.1 43.8,7.62 XS2.A16
S\D\C\S\: DD1.28 R1.1 XS4.1 XS5.2 | length 84.9
  Top Layer w0.25: v1(24.025,25.35) 24.025,36.3 53.5,36.3 55.475,34.325 58.6,34.325 v1(61,31.925) 67.775,31.925 XS4.1 ; v2(72.775,27.425) v2(72.775,31.35)
  Bottom Layer w0.25: v1(24.025,25.35) 27.55,25.35 27.65,25.45 DD1.28 ; R1.1 61,34.35 v1(61,31.925) 71.1,31.925 71.675,31.35 v2(72.775,31.35) ; v2(72.775,27.425) XS5.2
SCK: DD1.33 XS4.5 XS5.5 | length 93.4
  Top Layer w0.25: v1(22.075,29.375) 22.075,37.325 22.225,37.475 v2(57.275,37.475) ; v2(58.825,21.9) XS4.5 v2(70.95,21.9) ; v2(75.8,21.9) 75.8,29.35 v2(77.2,30.75)
  Bottom Layer w0.25: v1(22.075,29.375) 27.675,29.375 DD1.33 DD1.33@27.65,29.45 ; v2(57.275,37.475) 58.1,36.65 58.1,31.025 58.825,30.3 v2(58.825,21.9) ; v2(70.95,21.9) v2(75.8,21.9) ; v2(77.2,30.75) 77.225,30.725 XS5.5
SDACT: 
SDAT1: R5.1 XS4.8 XS5.8 | length 26.9
  Top Layer w0.25: XS4.8 69.075,15.3 74.8,21.025 74.8,32.45 v2(76.425,34.075)
  Bottom Layer w0.25: R5.1 76.4,34.025 XS5.8
SDAT2: R7.1 XS4.9 XS5.1 | length 24.1
  Top Layer w0.25: v2(65.6,34.425) 67.761,34.425 XS4.9 ; v2(72.025,26.35) v2(72.025,32.55)
  Bottom Layer w0.25: R7.1 63.8,34.425 v2(65.6,34.425) 70.15,34.425 71.75,32.825 71.825,32.825 ; v2(72.025,26.35) 78.975,26.35 XS5.1
TCK: DD1.26 R2.2 XS3.1 | length 34
  Top Layer w0.25: XS3.1 19.455,19.42 19.455,31.48 R2.2
  Bottom Layer w0.25: v1(19.45,23.85) 19.5,23.8 DD1.26
TDI: DD1.1 R8.2 XS3.9 | length 58.6
  Top Layer w0.25: XS3.9 10.93,29.58 11,29.65 R8.2 ; v1(23.775,20.4) 26.725,17.45 38.625,17.45 41.65,20.475 41.65,23.3 41,23.95 41,28.875 v1(41.5,29.375)
  Bottom Layer w0.25: v1(10.975,29.65) 10.975,25.025 15.6,20.4 v1(23.775,20.4) ; DD1.1 39.125,29.375 v1(41.5,29.375)
TDO: DD1.32 R4.2 XS3.3 | length 31.5
  Top Layer w0.25: XS3.3 16.61,21.96 16.61,31.46 R4.2
  Bottom Layer w0.25: v1(16.625,28.6) 22.6,28.6 DD1.32
TMS: DD1.7 R6.2 XS3.5 | length 57
  Top Layer w0.25: XS3.5 13.8,24.5 13.825,24.525 R6.2 ; v1(22.75,21.85) 22.75,20.125 26.125,16.75 39.375,16.75 42.55,19.925 42.55,23.7 v1(42,24.25)
  Bottom Layer w0.25: v1(13.75,24.575) 16.475,21.85 v1(22.75,21.85) ; DD1.7 41.65,24.6 v1(42,24.25)
TURBO: XS1.B5 XS2.B5 | length 11.5
  Top Layer w0.25: XS1.B5 17.28,-4.955 XS2.B5
W\A\I\T\: XS1.B21 XS2.B21 | length 11.5
  Top Layer w0.25: XS1.B21 57.92,-4.955 XS2.B21
W\R\: DD1.10 XS1.B19 XS2.B19 | length 34.1
  Top Layer w0.25: v1(47.425,15.175) 51.55,11.05 51.55,7.79 XS2.B19 52.84,-4.955 XS1.B19
  Bottom Layer w0.25: DD1.10 41.1,22.2 47.425,15.875 v1(47.425,15.175)
pads on no net: DD1.25 DD1.34 DD1.35 XS1.A6 XS1.A7 XS1.A14 XS1.A15 XS1.A17 XS1.A18 XS1.A31 XS1.B20 XS1.B22 XS1.B23 XS1.B29 XS1.B31 XS2.A6 XS2.A7 XS2.A14 XS2.A15 XS2.A17 XS2.A18 XS2.A31 XS2.B20 XS2.B22 XS2.B23 XS2.B29 XS2.B31 XS3.6 XS3.7 XS3.8 XS4.10 XS4.14 XS4.15 XS5.9
copper on no net:
  other v5: 89.8,25.475 89.8,33.475

## Polygon pours and split planes (outlines as drawn)
gnd on Bottom Layer "gm" (solid, pour order 8): 90.85,13.5 93,13.5 93,37.225 92.95,37.275 80.575,37.275 80.575,37.425 79.2,37.425 79.2,36.05 81,36.05 82.275,36.05 82.275,32.15 78.2,32.15 78.2,31.5 82.925,31.5 82.925,36.05 90.85,36.05 90.85,34.075 90.85,21.525 80.275,21.525 80.275,22.15 80.275,22.45 79.05,22.45 79.05,20.85 87.425,20.9 87.825,20.902 87.825,19.675 90.85,19.675
gnd on Bottom Layer "gm" (solid, pour order 6): 74.825,10.975 74.825,13.05 70.3,13.05 70.3,12.325 64.575,12.325 64.575,13.125 66.7,13.125 66.725,15.275 66.725,15.55 64.575,15.55 64.575,22.225 67.05,22.225 67.05,28.125 61.275,28.125 61.275,22.375 61.25,22.35 63.675,22.35 63.675,15.475 61.45,15.475 61.45,13.05 63.675,13.05 63.675,10.975
gnd on Bottom Layer "gm" (solid, pour order 0): 39.3,19.6 39.4,19.5 39.325,31.7 42.512,34.613 53,34.613 53,40.4 52.225,40.4 52.225,35.38 42.512,35.38 38.498,31.475 27.5,31.4 27.5,19.6
gnd on Top Layer "gm" (solid, pour order 4): 80.1,-5.225 80.125,-5.2 81.375,-5.2 81.375,5.525 81.975,5.525 81.975,10.875 93.465,10.875 93.465,41.04 34.3,41.04 34.3,40.2 2.5,40.2 2.5,30.144 0.875,30.144 0.875,18.625 4.198,18.625 4.198,20.207 1.78,20.207 1.78,28.825 4.198,28.825 4.198,38.05 35.8,38.05 35.8,40.4 52.154,40.4 52.154,39.725 90.725,39.725 90.725,13.05 72.9,13.05 72.9,10.875 79.7,10.875 79.7,5.525 80.225,5.525 80.225,-3.05 80.15,-3.125
gnd on Top Layer "gm" (solid, pour order 2): 31.075,27.225 31.1,27.2 36.025,27.2 36.025,22.1 34.85,22.1 34.85,23.375 32.425,23.375 32.425,25.3 31.075,25.3

## Other copper
Bottom Layer:
  pour cut-out: 26.7,26.775 26.725,26.8 29.95,26.8 29.95,22.45 26.674,22.45
  pour cut-out: 30.725,32.475 30.725,29 29.925,29 29.925,27.275 26.65,27.275 26.65,32.475
  pour cut-out: 40.25,21.675 36.95,21.675 36.95,26.75 40.25,26.75
  pour cut-out: 34.5,19.6 34.5,21.95 36.3,21.95 36.3,21.125 40.15,21.125 40.15,19.573
  pour cut-out: 27.2,21.908 33.925,21.908 33.925,19.208 27.4,19.208 27.2,19.408
  pour cut-out: 31.25,32.475 31.25,29.025 36.475,29.025 38.225,30.775 38.225,31.225 39.475,32.475
  pour cut-out: 36.925,27.275 36.875,27.225 36.875,28.725 36.85,28.75 38.525,30.425 38.55,30.425 38.55,30.925 39.325,31.7 39.95,31.7 39.95,27.3 39.925,27.275

## Silkscreen, mask and mechanical layers (free items; w line width, h text height)
Top Overlay:
  text "RWE" at 34.525,35.475 h3
  text "PWR" at 48.725,30.7 h3
  text "B1" at 4.975,1.5 h3
  text "311" at 82.725,1.5 h3
Bottom Overlay:
  text "for Jeckas" at 89.575,16.05 h4
  text "ZX SD-SPI" at 16.075,14.875 h4
  text "2024" at 16.15,11.45 h4
  text "A1" at 6.4,1.7 h3
  text "A31" at 85.5,1.7 h3
Mechanical 1:
  lines w0.254: 0.075,0.1 0.075,41.5 94.6,41.5 ; 0.1,0 3.075,0 cw(c3.075,-1.25) 4.325,-1.25 4.325,-10.25 86.075,-10.25 86.075,-1.25 cw(c87.325,-1.25) 87.325,0 94.5,0 ; 94.575,0 94.575,41.5